# Altium PCB Hot-Swap_Solutions.PcbDoc
Units mil, origin at the board's own origin, x right, y up, seen from the top; angles counter-clockwise.
Board outline 1320 x 800 mil, 2 copper layers (Top Layer, Bottom Layer); 4 components, 3 nets, 9 pads, 4 vias.
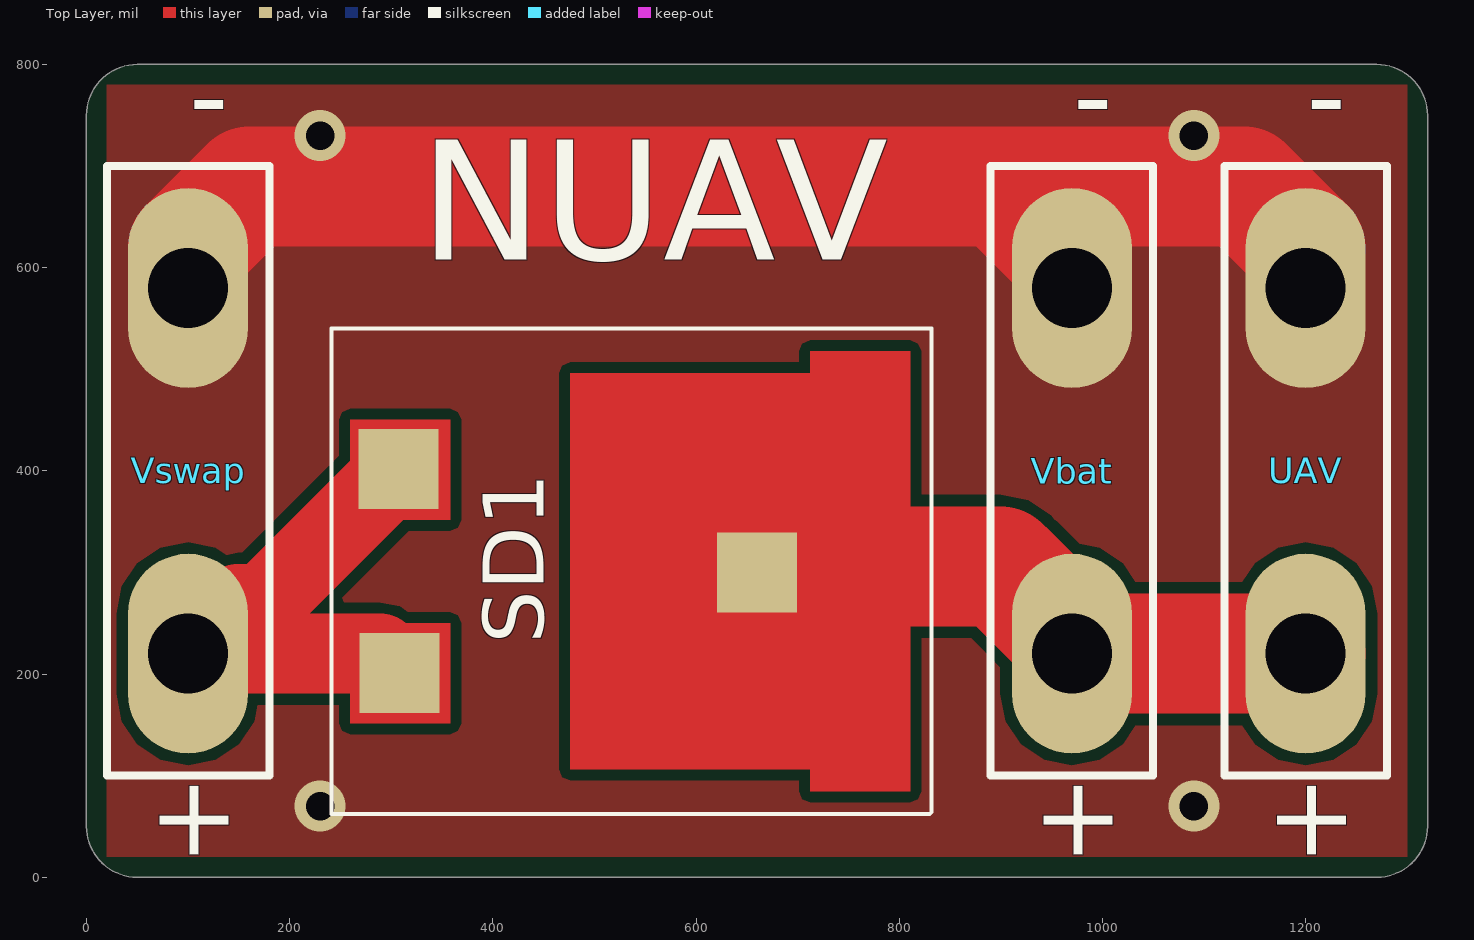
[diagram p0: Top Layer view]
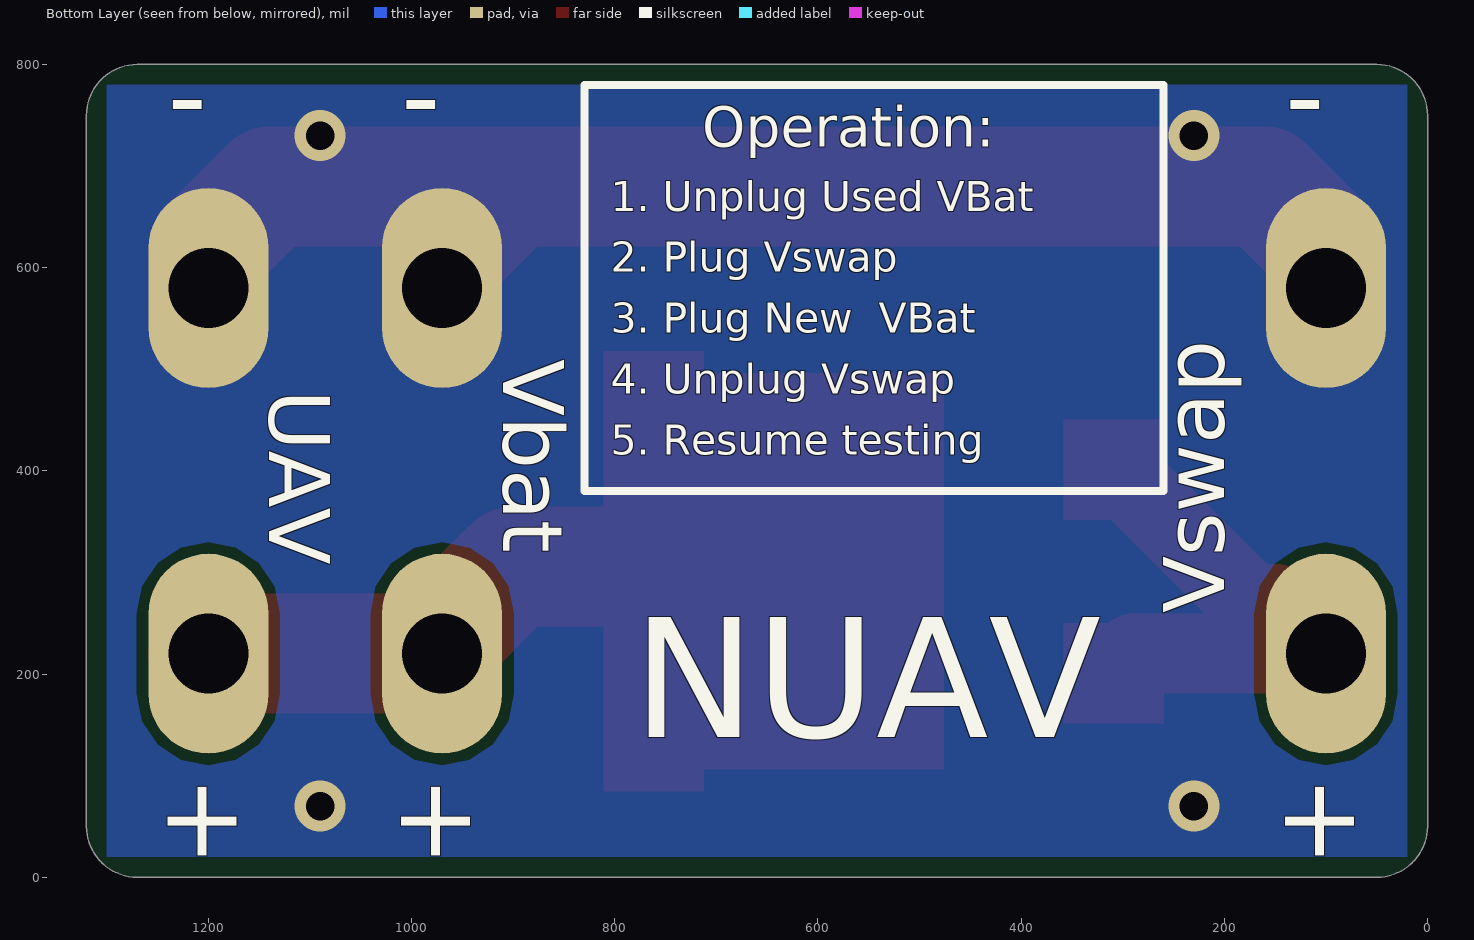
[diagram p1: Bottom Layer view, seen from below]

## Layer stack, top to bottom
Top Solder: solder mask 0.4, Solder Resist, Dk 3.5
Top Layer: signal copper 1.4
Dielectric 1: dielectric 12.6, FR-4, Dk 4.8
Bottom Layer: signal copper 1.4
Bottom Solder: solder mask 0.4, Solder Resist, Dk 3.5

## Board outline
0,50 0,750 cw(c50,750) 50,800 1270,800 cw(c1270,750) 1320,750 1320,50 cw(c1270,50) 1270,0 50,0 cw(c50,50)

## Design rules (kind name [scope] priority, off if disabled: settings)
Clearance [All] p1: gap=10 ignorepadtopadclearanceinfootprint=FALSE except(0: Arc-Hole Track-Hole SMDPad-Hole THPad-Hole Via-Hole Fill-Hole Poly-Hole Region-Hole Text-Hole)
PlaneConnect [All] p1: planeconnectstyle=Direct reliefexpansion=20 reliefentries=4 reliefconductorwidth=10 reliefairgap=10
PolygonConnect [All] p1: connectstyle=Direct reliefconductorwidth=10 reliefentries=4 polygonreliefangle="90 Angle" airgapwidth=10
RoutingVias [All] p1: holewidth=28 width=50 viastyle="Through Hole" minholewidth=28 minwidth=50 maxholewidth=28 maxwidth=50
SolderMaskExpansion [All] p1: expansion=4 istentingtop=FALSE
Width [All] p1: maxlimit=393.7 minlimit=10 preferedwidth=10
29 further rules are at their usual default settings.

## Components (designator, comment, footprint, x,y, rotation, side; value= is the part's Value field where it differs from the comment)
SD1 "Schottky Diode" "SCHOTTKY BARRIER DIODE" 476,301 r270 top
UAV "PRT-10474" "XT60 CONNECTOR REPLACEMENT" 1200,400 r90 top (schematic designator C3)
Vbat "PRT-10474" "XT60 CONNECTOR REPLACEMENT" 970,400 r90 top (schematic designator C2)
Vswap "PRT-10474" "XT60 CONNECTOR REPLACEMENT" 100,400 r90 top (schematic designator C1)

## Footprints (in the part's own frame and the unit in brackets; to place one, negate y for a bottom-side part, rotate by r counter-clockwise, add the part's x,y. Pads: shape width x height; smd on the part's side, far side on the other; paste and mask are expansions set on the pad)
"SCHOTTKY BARRIER DIODE" [mm]
  rect 2x2 smd: 1(-2.565,-4.293) 2(2.54,-4.267) 3(0.025,4.674)
  Top Layer region: -5.486,7.061
  Top Layer region: -5.486,7.061
  Top Layer pour cut-out: 0.686,6.045
  Top Layer pour cut-out: -0.483,5.029
  Top Layer region: 0.254,6.35
  Top Layer pour cut-out: 0.4,4.6
  Top Layer pour cut-out: 3.4,3.8
  Top Layer region: 0.254,6.35
  Top Layer pour cut-out: 0.4,4.6
  Top Layer pour cut-out: 3.4,3.8
  Top Layer region: -4.95,0 -4.95,6 -5.5,6 -5.5,8.5 5.5,8.5 5.5,6 4.95,6 4.95,0 -4.95,0
  Top Layer region: -1.29,-3 -3.79,-3 -3.79,-5.5 -1.29,-5.5 -1.29,-3
  Top Layer region: 1.29,-3 3.79,-3 3.79,-5.5 1.29,-5.5 1.29,-3
  Multi-Layer region: 3.112,12.869
  Multi-Layer region: 8.534,-0.229
  silkscreen extent -6.07,-5.97 6.07,9.04
"XT60 CONNECTOR REPLACEMENT" [mm]
  oval 5x3 hole 2: 1(-4.572,0) 2(4.572,0)
  silkscreen extent -7.62,-2.03 7.62,2.03

## Part data
SD1: library part RB228NS-40FHTL, Average Rectified Current=30A, Case/Package=TO-263-3, Manufacturer=Rohm, Max Reverse Voltage (DC)=40V, Supplier Part Number 1=RB228NS-40FHTLCT-ND, ComponentLink1Description=https://www.rohm.com/datasheet/RB228NS-40FH/rb228ns-40fhtl-e?src-supplier=Digi-Key, ComponentLink1URL=https://www.rohm.com/datasheet/RB228NS-40FH/rb228ns-40fhtl-e?src-supplier=Digi-Key, Element Configuration="Common Cathode", Manufacturer Part Number=RB228NS-40FHTL, Mount="Surface Mount", Packaging="Tape and Reel", Pricing 1="1=1.73000, 10=1.55700, 25=1.46920, 100=1.14580, 250=1.11644, 500=0.96954 (USD)", RoHS=No, Stock 1=969, Supplier 1=Digi-Key
UAV Vbat Vswap: "XT60 CONNECTORS MALE/FEMALE PAIR", Manufacturer=SparkFun, Supplier Part Number 1=1568-1816-ND, ComponentLink1Description=https://cdn.sparkfun.com/datasheets/Prototyping/xt60.pdf?src-supplier=Digi-Key, ComponentLink1URL=https://cdn.sparkfun.com/datasheets/Prototyping/xt60.pdf?src-supplier=Digi-Key, Manufacturer Part Number=PRT-10474, Pricing 1="1=1.50000 (USD)", RoHS=No, Stock 1=2291, Supplier 1=Digi-Key

## Via types
v1: diameter 50, hole 28, Top Layer to Bottom Layer, 4 vias

## Nets (pads, with @x,y where several pads share a name; then routed paths per layer and width w, separated by ;. In a path a pad name is that pad's centre, name@x,y a point inside that pad or via, vN(x,y) a via of type N, cw(c..) or ccw(c..) an arc to the next point about the centre after c; other vN are vias at no path point)
GND: UAV.2 Vbat.2 Vswap.2 | length 1358
  Top Layer w10: Vswap.2 Vswap.2@100,619.37 ; Vbat.2 Vbat.2@970,610 ; UAV.2 UAV.2@1200,619.37
  Top Layer w118.11: Vswap.2@100,619.37 160.63,680 900,680 ; Vbat.2@970,610 900,680 ; UAV.2@1200,619.37 1139.37,680 900,680
  other v1: 230,70 1090,70 230,730 1090,730
Vbattery: SD1.3 UAV.1 Vbat.1 | length 587.4
  Top Layer w10: SD1.3 713.79,300 719.79,306 ; 899.9,306 905.9,300 ; Vbat.1 Vbat.1@970,235.9
  Top Layer w118.11: 719.79,306 899.9,306 ; 905.9,300 Vbat.1@970,235.9 ; Vbat.1 UAV.1
Vswap: SD1.1 SD1.2 Vswap.1 | length 525.4
  Top Layer w10: Vswap.1 Vswap.1@149.06,269.06 ; SD1.2@289,220 SD1.2 ; SD1.2@326,221 SD1.2@345.21,201.79
  Top Layer w78.74: Vswap.1 SD1.2@289,220 ; Vswap.1@149.06,269.06 174.06,269.06 SD1.1

## Polygon pours and split planes (outlines as drawn)
GND on Top Layer "GND_L01_P008" (solid, pour order 8): 20,780 20,20 1300,20 1300,780
GND on Top Layer "GND_L01_P009" (solid, pour order 9): 1040,-100
no net on Top Layer "NONET_L01_P004" (solid, pour order 4): 1300,780
no net on Top Layer "NONET_L01_P001" (solid, pour order 1): 3200,800
GND on Bottom Layer "GND_L02_P010" (solid, pour order 10): 20,780 1300,780 1300,20 20,20
GND on Bottom Layer "GND_L02_P011" (solid, pour order 11): 1260,820
no net on Bottom Layer "NONET_L02_P002" (solid, pour order 2): -1700,3700

## Silkscreen, mask and mechanical layers (free items; w line width, h text height)
Top Overlay:
  text "NUAV" at 327.87,607.87 h118.11
Bottom Overlay:
  lines w7.87: 260,380 260,780 830,780 830,380 260,380
  text "Operation:" at 714.09,719.02 h39.37
  text "1. Unplug Used VBat" at 804.09,655.74 h29.53
  text "2. Plug Vswap" at 804.09,595.74 h29.53
  text "3. Plug New  VBat" at 804.09,535.74 h29.53
  text "4. Unplug Vswap" at 804.09,475.74 h29.53
  text "5. Resume testing" at 804.09,415.74 h29.53
  text "NUAV" at 782.13,137.87 h118.11
Outline:
  the board outline again, w8

## Text inside footprints (layer, text, board x,y; h text height)
UAV: Top Overlay "+" at 1240,11 h78.74 r90; Top Overlay "-" at 1240,790 h78.74 r180; Bottom Overlay "+" at 1240,10 h78.74 r90; Bottom Overlay "-" at 1240,790 h78.74 r180
Vbat: Top Overlay "+" at 1010,11 h78.74 r90; Top Overlay "-" at 1010,790 h78.74 r180; Bottom Overlay "+" at 1010,10 h78.74 r90; Bottom Overlay "-" at 1010,790 h78.74 r180
Vswap: Top Overlay "-" at 140,790 h78.74 r180; Top Overlay "+" at 140,11 h78.74 r90; Bottom Overlay "-" at 140,790 h78.74 r180; Bottom Overlay "+" at 140,10 h78.74 r90